# EAGLE board XL4432-SMT (EAGLE 6.4)
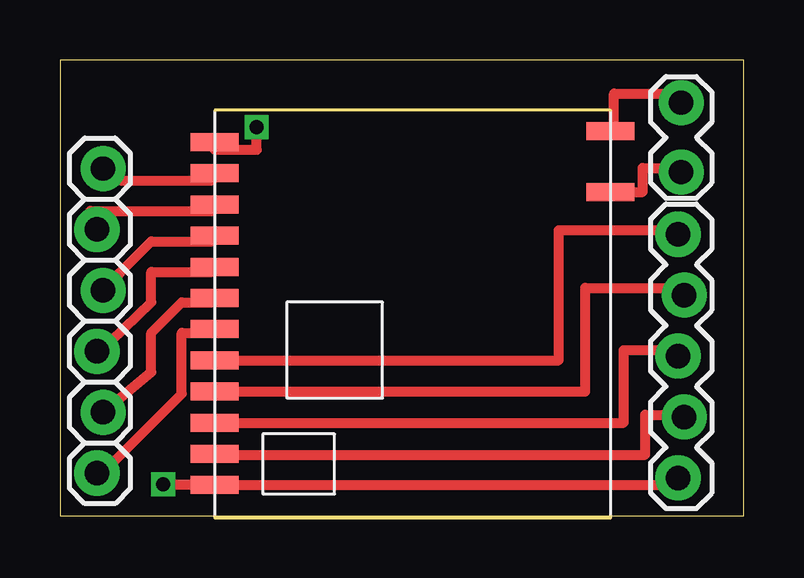
[diagram p0: board, top side]
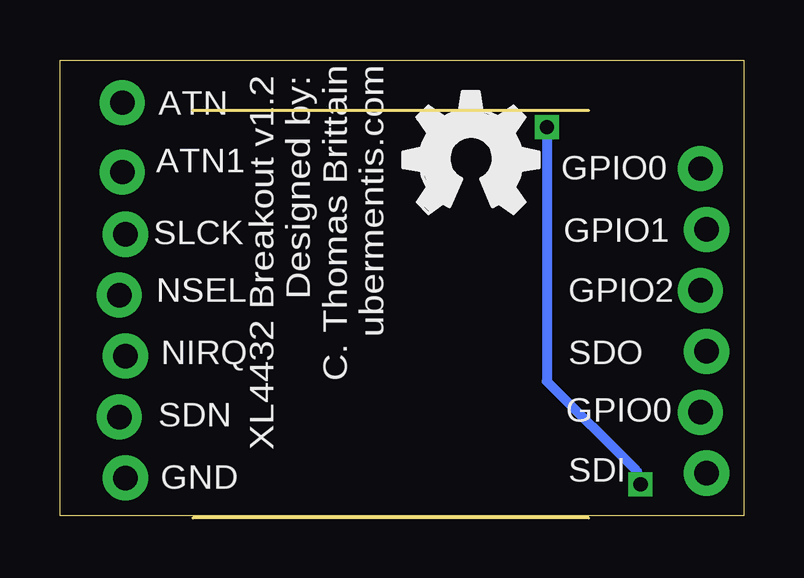
[diagram p1: board, bottom side, seen from below]

Size 28.5 x 19 mm. Coordinates in mm from the lower left corner, seen from the top.
Outline: 0,0 28.5,0 28.5,19 0,19 0,0
Copper layers (1*16): Top 0.035mm / dielectric 1.5mm / Bottom 0.035mm
Design rules "default": minimum track width 10mil, minimum drill 24mil, track to track 8mil, track to pad 8mil, pad to pad 8mil, via to via 8mil, smd to smd 8mil, copper to edge 40mil, drill to drill 8mil, minimum pad ring 10mil, minimum via ring 8mil, stop-mask expansion 4mil, vias tented up to drill 0mil, thermal gap 10mil

## Footprints (pad centres in the part's own frame; a part is rotated, then mirrored left to right if it is on the bottom)
1X06_LOCK = drill 1.016 pad 1.88: 1 0,0; 2 2.54,-0.254; 3 5.08,0; 4 7.62,-0.254; 5 10.16,0; 6 12.7,-0.254
1X02_LOCK = drill 1.016 pad 1.88: 1 -0.178,0; 2 2.718,0
1X05_LOCK = drill 1.016 pad 1.88: 1 0,0.127; 2 2.54,-0.127; 3 5.08,0.127; 4 7.62,-0.127; 5 10.16,0.127
XL4432-SMT = smd 2 x 0.75: ATN 16.5,16.134; ATN1 16.5,13.594; GND 0,15.675; GND1 0,1.375; GPIO0 0,14.375; GPIO1 0,13.075; GPIO2 0,11.775; NIRQ 0,3.975; NSEL 0,5.275; SCLK 0,6.575; SDI 0,7.875; SDN 0,2.675; SDO 0,9.175; VDD 0,10.475

## Placement (x,y rotation side)
JP1  [1X06_LOCK]  1.54,1.77 90 top
JP2  [1X02_LOCK]  25.9,14.5 90 top
JP3  [1X05_LOCK]  25.9,1.57 90 top
U$1  XL4432-SMT  [XL4432-SMT]  6.45,-0.1 0 top
U$3  [OSHW_FILLX200_NOTEXT]  14.2,12.6 0 bottom

## Library data of the parts
JP1-JP3 = SparkFun
U$1 = Random parts
U$3 = ohw-logo

## Nets
GND: JP3.1 U$1.GND U$1.GND1
GPIO0: JP1.6 U$1.GPIO0
GPIO1: JP1.5 U$1.GPIO1
GPIO2: JP1.4 U$1.GPIO2
N$12: JP2.2 U$1.ATN
N$13: JP2.1 U$1.ATN1
NIRQ: JP3.3 U$1.NIRQ
NSEL: JP3.4 U$1.NSEL
SDI: JP1.1 U$1.SDI
SDN: JP3.2 U$1.SDN
SDO: JP1.2 U$1.SDO
SLCK: JP3.5 U$1.SCLK
VDD: JP1.3 U$1.VDD

## Tracks (layer width: path | path; a pad name or v marks a point on that pad's centre or on a via)
GND  (via drill 0.6)
  Top 0.254: 6.35,1.27 U$1.GND1 | 25.4,1.27 JP3.1 | 4.2,1.27 v4.3,1.3 | 6.45,15.24 U$1.GND
  Top 0.406: 25.4,1.27 6.35,1.27 | v8.2,16.2 8.2,15.24 6.45,15.24 | U$1.GND1 4.2,1.27
  Bottom 0.406: v8.2,16.2 8.2,5.6 4.5,1.9 v4.3,1.3
GPIO0
  Top 0.254: 6.35,13.97 U$1.GPIO0
  Top 0.406: 6.35,13.97 2.54,13.97 JP1.6
GPIO1
  Top 0.254: 6.35,12.7 U$1.GPIO1
  Top 0.406: 6.35,12.7 1.27,12.7 JP1.5
GPIO2
  Top 0.254: 6.35,11.43 U$1.GPIO2
  Top 0.406: 6.35,11.43 3.81,11.43 2.54,10.16 1.94,9.49 JP1.4
N$12
  Top 0.406: U$1.ATN 23.1,16.03 23.1,17.6 25.9,17.6 JP2.2
N$13
  Top 0.406: U$1.ATN1 24.3,13.49 24.3,14.5 25.9,14.5 JP2.1
NIRQ
  Top 0.406: U$1.NIRQ 23.5,3.88 23.5,6.9 25.77,6.9 JP3.3
NSEL
  Top 0.406: U$1.NSEL 21.9,5.17 21.9,9.5 26.03,9.5 JP3.4
SDI
  Top 0.254: 6.35,7.62 U$1.SDI | 1.27,1.27 JP1.1
  Top 0.406: 6.35,7.62 5.08,7.62 5.08,5.08 1.27,1.27
SDN
  Top 0.254: 6.35,2.54 U$1.SDN
  Top 0.406: 6.35,2.54 24.4,2.54 24.4,4.2 26.03,4.2 JP3.2
  Bottom 0.254: 25.4,3.81 JP3.2
SDO
  Top 0.254: 6.35,8.89 U$1.SDO
  Top 0.406: 6.35,8.89 5.08,8.89 3.81,7.62 3.81,5.98 2.04,4.51 JP1.2
SLCK
  Top 0.406: U$1.SCLK 20.8,6.47 20.8,11.9 25.77,11.9 JP3.5
VDD
  Top 0.254: 6.35,10.16 U$1.VDD | 1.57,6.75 JP1.3
  Top 0.406: 6.35,10.16 3.81,10.16 3.81,8.89 1.57,6.75

## Text on the board
_bsilk: XL4432 Breakout v1.2 / Designed by: / C. Thomas Brittain / ubermentis.com | ATN | GPIO0 | ATN1 | GPIO1 | SLCK | GPIO2 | NSEL | SDO | NIRQ | GPIO0 | SDN | SDI | GND